# EAGLE board LightSensitiveDCPower (EAGLE 7.1.0)
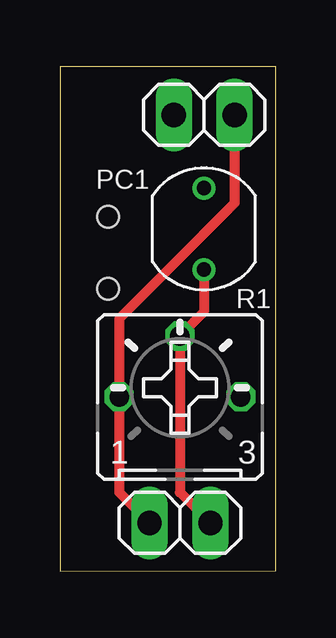
[diagram p0: board, top side]
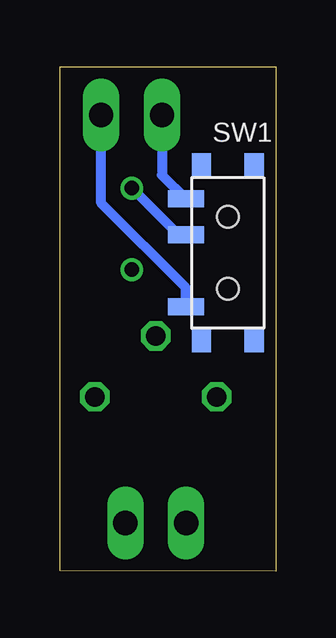
[diagram p1: board, bottom side, seen from below]

Size 9.01 x 21.01 mm. Coordinates in mm from the lower left corner, seen from the top.
Outline: 0.01,0 9.01,0.01 9.01,21.01 0,21.01 0.01,0
Copper layers (1*16): Top 0.0356mm / dielectric 1.5011mm / Bottom 0.0356mm
Design rules "LaenPCBOrder": minimum track width 6mil, minimum drill 13mil, track to track 6mil, track to pad 6mil, pad to pad 6mil, via to via 6mil, smd to smd 6mil, copper to edge 15mil, drill to drill 6mil, minimum pad ring 7mil, minimum via ring 7mil, stop-mask expansion 3mil, vias tented up to drill 0mil, thermal gap 10mil

## Footprints (pad centres in the part's own frame; a part is rotated, then mirrored left to right if it is on the bottom)
1X02 = drill 1.016 long: 1 -1.27,0; 2 1.27,0
PHOTOCELL_CERAMIC = drill 0.6: 1 0,1.7; 2 0,-1.7
B25P = drill 0.813 octagon: A -2.54,0; E 2.54,0; S 0,2.54
PCM12SMTR = smd 0.7 x 1.5: 1 -2.25,1.75; 2 0.75,1.75; 3 2.25,1.75 | smd 1 x 0.8: 4 -3.65,1.1; 5 -3.65,-1.1; 6 3.65,1.1; 7 3.65,-1.1 | hole 0.9: -1.5,0; 1.5,0

## Placement (x,y rotation side)
IN  [1X02]  6.02,19.01 180 top
OUT  [1X02]  5.01,2.01 0 top
PC1  [PHOTOCELL_CERAMIC]  6.01,14.26 0 top
R1  [B25P]  5.01,7.26 0 top
SW1  PCM12SMTR  [PCM12SMTR]  2.01,13.26 90 bottom

## Library data of the parts
IN OUT = pinhead
PC1 SW1 = freddyLibr
R1 = pot

## Nets
N$1: IN.1 OUT.1 R1.A SW1.1
N$2: IN.2 SW1.3
N$3: PC1.1 SW1.2
N$4: OUT.2 PC1.2 R1.S

## Tracks (layer width: path | path; a pad name or v marks a point on that pad's centre or on a via)
N$1
  Top 0.406: OUT.1 2.47,3.28 R1.A 2.47,10.51 7.29,15.33 IN.1
  Bottom 0.406: SW1.1 3.76,11.8 7.29,15.33 IN.1
N$2
  Bottom 0.406: IN.2 4.75,16.5 SW1.3
N$3
  Bottom 0.406: SW1.2 4.06,14.01 PC1.1
N$4
  Top 0.406: PC1.2 6.01,10.8 R1.S 5.01,3.28 OUT.2

## Text on the board
tDocu: VIN | GND | LiSePow / Rev1 / 09/27/14 | GND | VOUT